# Altium PCB VFD_Clock.PcbDoc (part 2 of 2)
Units mil, origin at the board's own origin, x right, y up, seen from the top; angles counter-clockwise.
Board outline 9810.03 x 3515.03 mil, 2 copper layers (Top Layer, Bottom Layer); 86 components, 150 nets, 539 pads, 317 vias.
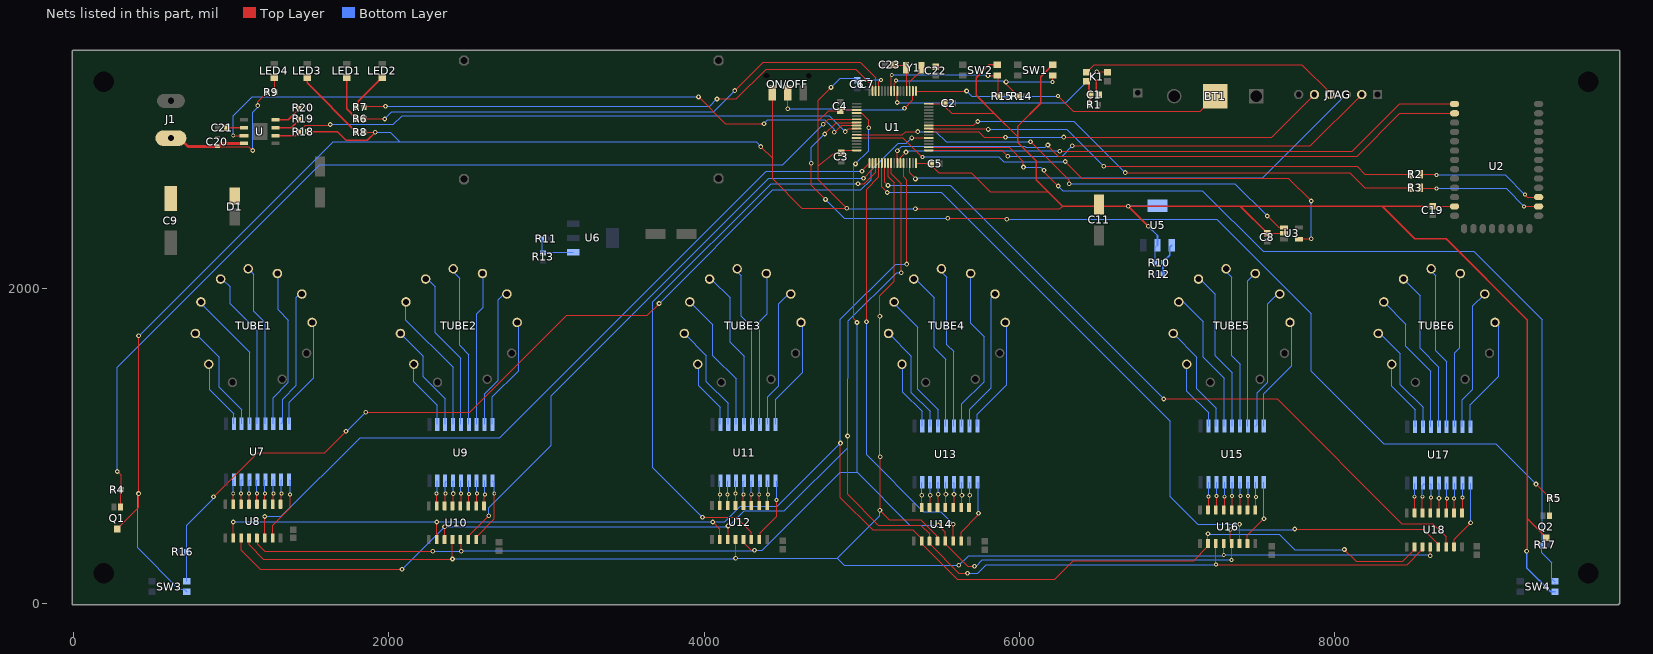
[diagram p2: the nets of this part, all layers, seen from the top]

## Via types
v1: diameter 25, hole 13, Top Layer to Bottom Layer, 162 vias
v2: diameter 30, hole 15, Top Layer to Bottom Layer, 136 vias
v3: diameter 50, hole 28, Top Layer to Bottom Layer, 18 vias
v4: diameter 25, hole 15, Top Layer to Bottom Layer, 1 vias

## Nets (pads, with @x,y where several pads share a name; then routed paths per layer and width w, separated by ;. In a path a pad name is that pad's centre, name@x,y a point inside that pad or via, vN(x,y) a via of type N, cw(c..) or ccw(c..) an arc to the next point about the centre after c; other vN are vias at no path point) (continued)
MCU_VDD: C2.2 C3.2 C4.2 C5.2 C6.1 C7.2 C8.2 C11.1 C19.2 ON/OFF.3 Q1.3 Q2.3 R8.2 R10.2 R18.2 SW1.4 SW2.4 SW3.4 SW4.4 U1.13 U1.19 U1.32 U1.48 U1.64 U2.12 U3.2 U5.2 U5.4 | length 21483.3
  Top Layer w6: Q1.3@280,475.12 280,477.09 415,612.09 v2(415,700) v2(415,1700) ; Q1.3@296.69,468.77 Q1.3@296.69,481.69 ; R8.2@1843.62,2990 v2(1915,2990) ; v2(4360,2900) 4435,2825 ; ON/OFF.3@4435,3237.44 4435,2825 ; v2(4805,3275) 4725,3195 4725,3063.57 ; v2(4905,2508.75) v2@4905,2510 ; U1.32@4967.82,2876.19 4884.62,2876.19 C3.2@4870,2861.57 4827.36,2861.57 4725,2779.21 ; U1.19@4967.82,3132.1 4868.67,3132.1 C4.2@4865,3128.43 4789.85,3128.43 4725,3063.57 ; U1.13@5107.59,3252.18 5108.37,3252.96 5108.37,3311.03 v1(5120.7,3323.36) ; v2(5340,2505) 6256.77,2505 6273.35,2521.57 ; U1.48@5343.81,2795.48 5432.94,2795.48 C5.2@5438.43,2790 ; U1.64@5423.35,3172.64 5511.06,3172.64 C2.2@5513.43,3175 ; C5.2@5456.09,2772.33 C5.2@5438.43,2790 ; C2.2@5523.43,3175 5523.43,3156.57 5570,3110 5840,3110 ; 6179.96,2614.96 6179.92,2615 5815,2615 5695,2735 5486.85,2735 5438.43,2783.43 C5.2@5438.43,2790 ; C8.2@7570,2351.57 7676.18,2351.57 U3.2@7677.76,2350 ; C19.2@8620,2521.57 8621.18,2520.39 U2.12@8758.46,2520.39 ; 4435,2825 4435,2695 4620,2510 v2@4905,2510 ; 4725,2779.21 4725,3063.57 ; 4725,2779.21 4725,2690 v2@4905,2510
  Top Layer w10: R18.2@1484.61,2995 1675,2995 1730,2940 1865,2940 v2(1915,2990) ; ON/OFF.3@4431.57,3240.87 ON/OFF.3@4435,3237.44 ; SW2.4@5860.24,3418.46 5806.3,3418.46 5725,3337.16 5725,3225 5840,3110 5990,2960 ; 6179.92,2615 6105,2689.92 6105,2810 5990,2925 5990,2960 ; 6179.96,2614.96 6273.35,2521.57 v2(6690,2521.57) ; SW1.4@6210.24,3418.46 6135,3343.23 6135,3175 5990,3030 5990,2960 ; v2(6816.57,2395) v2(6690,2521.57) ; C8.2@7570,2351.57 7400,2521.57 ; C19.2@8620,2521.57 8300,2521.57 ; v2(9215,335) 9220,340 9220,542.09 ; Q2.3@9340,420.12 9340,422.09 9220,542.09 ; v2(6690,2521.57) 7400,2521.57 ; 7400,2521.57 8300,2521.57 ; 8300,2521.57 8506.57,2315 8705,2315 9220,1800 9220,542.09
  Bottom Layer w6: 410,685 410,355 671.01,93.99 703.55,93.99 SW3.4@720.24,77.3 ; v2(415,1700) 420,1700 1650,2930 2070,2930 ; v2(1915,2990) 2010,2990 2070,2930 ; v2(4360,2900) 4330,2930 2070,2930 ; v2(4805,3275) 4863.43,3333.43 4958.15,3333.43 C6.1@4970,3321.57 4972.95,3324.53 C7.2@5027.13,3324.53 ; v2(4905,2508.75) 4906.88,2506.88 5338.12,2506.88 v2(5340,2505) ; C7.2@5021.27,3330.54 5021.27,3330.39 C7.2@5027.13,3324.53 ; v1@5119.53,3324.53 C7.2@5035,3324.53 C7.2@5027.13,3324.53 ; R10.2@6860.39,2165 6860.39,2260.39 U5.2@6875,2275
  Bottom Layer w10: v2(6816.57,2395) 6875,2336.57 U5.2@6875,2275 ; v2(9215,335) 9215,230 9367.7,77.3 SW4.4@9395.24,77.3
  Bottom Layer w12: v2(6690,2521.57) 6871.57,2521.57 U5.4@6875,2525
NetC1_1: C1.1 JTAG.4 K1.1 | length 1827.6
  Top Layer w6: K1.1@6425,3372.09 6426.97,3372.09 6474.88,3420 7790,3420 7970,3240 JTAG.4@7970,3230
  Top Layer w10: K1.1@6425,3372.09 6440.67,3356.42 6448.1,3356.42 6485.91,3318.61 6485.91,3245.67 C1.1@6501.57,3230
NetC1_2: C1.2 K1.2 R1.1 | length 160.9
  Top Layer w10: K1.2@6425,3315 6440.67,3299.33 6440.67,3237.76 C1.2@6448.43,3230 6445.47,3227.05 R1.1@6445.47,3165
NetC21_2: C21.2 U.2 | length 109.2
  Top Layer w10: C21.2@973.54,3020 973.74,3019.8 U.2@1082.64,3019.8
NetC22_2: C22.2 U1.3 Y1.1 | length 272.3
  Top Layer w6: U1.3@5304.44,3252.18 5304.44,3309.48 5379.21,3384.25 Y1.1@5379.21,3400 5463.43,3400 C22.2@5470,3406.57
NetC23_2: C23.2 U1.4 Y1.2 | length 235.4
  Top Layer w6: C23.2@5203.15,3420 5206.46,3416.69 5264.1,3416.69 Y1.2@5280.79,3400 5284.75,3396.04 U1.4@5284.75,3252.18
NetJTAG_2: JTAG.2 U1.49 | length 2923.7
  Top Layer w6: U1.49@5424.52,2876.19 5888.81,2876.19 v2(5926.17,2838.83) ; v2(6335,2905) 7845,2905 JTAG.2@8170,3230
  Bottom Layer w6: v2@5925,2840 6270,2840 v2(6335,2905)
NetJTAG_3: JTAG.3 U1.46 | length 3064.7
  Top Layer w6: U1.46@5304.44,2795.48 5304.44,2735.56 5340,2700 v2(5340,2695)
  Bottom Layer w6: v2@5340,2700 5343,2703 7543,2703 JTAG.3@8070,3230
NetJTAG_5: JTAG.5 U1.55 | length 2573.2
  Top Layer w6: U1.55@5424.52,2994.3 5725.7,2994.3 5726.17,2993.83 5741.17,2993.83 5776.17,2958.83 v2(5911.17,2958.83) ; v2(6280,2960) 7600,2960 JTAG.5@7870,3230
  Bottom Layer w6: v2@5910,2960 v2(6280,2960)
NetK1_3: K1.3 U1.7 | length 1485.9
  Top Layer w6: v2(5225.7,3179.3) U1.7@5225.7,3252.18 ; v2(6490,3375) 6553.98,3375 K1.3@6556.89,3372.09
  Bottom Layer w6: v2@5226.43,3178.57 6293.57,3178.57 v2(6490,3375)
NetLED1_2: LED1.2 R6.1 | length 291.1
  Top Layer w8: LED1.2@1736.97,3338.66 LED1.2@1735,3338.66 1735,3138.35 1796.38,3076.97 R6.1@1796.38,3075
NetLED2_2: LED2.2 R7.1 | length 257.6
  Top Layer w8: R7.1@1796.38,3150 1808.13,3161.75 1808.13,3188.76 1956.65,3337.28 1958.62,3337.28 LED2.2@1960,3338.66
NetLED3_2: LED3.2 R8.1 | length 477.6
  Top Layer w8: LED3.2@1485,3338.66 1485,3303.35 1796.38,2991.97 R8.1@1796.38,2990
NetLED4_2: LED4.2 R9.1 | length 100.2
  Top Layer w6: LED4.2@1275,3343.66 1278.62,3340.04 R9.1@1278.62,3245
NetON/OFF_2: ON/OFF.2 U1.2 | length 978
  Top Layer w6: v2(4530,3140) ON/OFF.2@4530,3240.87 ; v2(5271.17,3143.83) 5324.12,3196.78 U1.2@5324.12,3252.18
  Bottom Layer w6: v2(4530,3140) 4892.94,3140 4898.67,3134.27 5255.12,3134.27 5265.84,3145 v2@5270,3145
NetQ1_1: Q1.1 R4.2 U1.22 | length 6245.1
  Top Layer w6: v2(280,840) 304.61,815.39 R4.2@304.61,725 304.61,709.25 301.65,706.3 Q1.1@301.65,614.88 ; v2@4755,3031.58 v2(4755,3040.79) 4786.47,3072.26 4967.04,3072.26 U1.22@4967.82,3073.04
  Bottom Layer w6: v2(280,840) 280,1500 1565,2785 4499.21,2785 v2(4755,3040.79)
NetQ2_1: Q2.1 R5.2 U1.23 | length 6426.5
  Top Layer w6: v2(4680,2795) 4680,2655 v2(4770,2565) ; v2(4765,2980) 4837.58,3052.58 4967.04,3052.58 U1.23@4967.82,3053.36 ; v2(5545,2445) 5915,2445 v2(5920,2440) ; v2(9275,760) 9275.39,760 R5.2@9365.39,670 9361.65,666.26 Q2.1@9361.65,559.88
  Bottom Layer w6: v2(4680,2795) 4680,2895 v2(4765,2980) ; v2(4770,2565) 4890,2445 v2(5545,2445) ; v2(5920,2440) 7250,2440 7850,1840 7850,1475 8310,1015 9020,1015 v2(9275,760)
NetR2_1: R2.1 U2.24 | length 809.3
  Top Layer w6: R2.1@8542.48,2725 8640,2725 v1(8645,2720) ; v1(9205,2595) 9220.55,2579.45 U2.24@9291.54,2579.45
  Bottom Layer w6: v1(8645,2720) 9080,2720 v1(9205,2595)
NetR2_2: R2.2 U1.56 | length 3174.4
  Top Layer w6: U1.56@5424.52,3013.99 5425.3,3013.21 5796.79,3013.21 v2(5801.17,3008.83) ; v2(6535,2775) 8140,2775 8190,2725 R2.2@8477.52,2725
  Bottom Layer w6: v2@5800,3010 6300,3010 v2(6535,2775)
NetR3_1: R3.1 U2.23 | length 798.9
  Top Layer w6: R3.1@8542.48,2640 8547.48,2635 v1(8645,2635) ; v1(9200,2520) 9200.19,2520.2 9291.34,2520.2 U2.23@9291.54,2520.39
  Bottom Layer w6: v1(8645,2635) 9085,2635 v1(9200,2520)
NetR3_2: R3.2 U1.57 | length 3238.6
  Top Layer w6: U1.57@5424.52,3033.67 5711.01,3033.67 v2(5736.17,3058.83) ; v2(6670,2735) 8095,2735 8190,2640 R3.2@8477.52,2640
  Bottom Layer w6: v2@5735,3060 6345,3060 v2(6670,2735)
NetR6_2: R6.2 U1.14 | length 3518.9
  Top Layer w6: R6.2@1843.62,3075 v2(1975,3075) ; v2(4195,3255) 4375,3435 4990,3435 5087.9,3337.1 U1.14@5087.9,3252.18
  Bottom Layer w6: v2(1975,3075) 2020,3120 4060,3120 v2(4195,3255)
NetR7_2: R7.2 U1.15 | length 3401.4
  Top Layer w6: R7.2@1843.62,3150 1843.62,3151.97 1846.65,3155 v2(1980,3155) ; v2(4082.05,3202.05) 4205.62,3202.05 4393.57,3390 4963.04,3390 5067.44,3285.6 5067.44,3252.96 U1.15@5068.22,3252.18
  Bottom Layer w6: v2(1980,3155) 4035,3155 v2(4082.05,3202.05)
NetR10_1: R10.1 R12.2 U5.1 | length 208.6
  Bottom Layer w10: R12.2@6908.62,2090 6909.61,2090.98 R10.1@6909.61,2165 6909.61,2167.95 6952.83,2211.18 6952.83,2262.28 U5.1@6965.55,2275
NetR11_1: R11.1 R13.1 U6.1 | length 284.9
  Bottom Layer w6: R11.1@2975.39,2315.39 2975.39,2229.21 R13.1@2980,2224.61 2985.24,2229.84 U6.1@3170,2229.84
NetR14_2: R14.2 SW1.3 U1.8 | length 1231.6
  Top Layer w6: U1.8@5206.01,3252.18 5206.01,3298.67 5216.17,3308.83 v1(5216.17,3318.83) ; v2(5915,3310) 5915,3296.38 R14.2@5991.38,3220 ; v1(6210,3310) 6210.24,3310.24 SW1.3@6210.24,3351.54
  Bottom Layer w6: v1(5216.17,3318.83) 5892.55,3318.83 5901.38,3310 v2(5915,3310) v1(6210,3310)
NetR15_2: R15.2 SW2.3 U1.9 | length 911.9
  Top Layer w6: U1.9@5186.33,3252.18 5185.66,3252.84 5185.66,3350.66 v1(5190,3355) ; v2(5800,3350) 5858.7,3350 SW2.3@5860.24,3351.54 5866.38,3345.39 R15.2@5866.38,3220
  Bottom Layer w6: v1(5190,3355) 5795,3355 v2(5800,3350)
NetR16_2: R16.2 SW3.3 U1.53 | length 6117.4
  Top Layer w6: v2(890,680) 1170,960 1595,960 v2(1730,1095) ; v2(1855,1215) 2515,1215 3130,1830 3640,1830 v2(3715,1905) ; v2(5317.27,2954.93) U1.53@5424.52,2954.93
  Bottom Layer w6: SW3.3@720.24,144.23 720.24,500.24 890,670 v2(890,680) ; v2(1730,1095) 1735,1095 v2(1855,1215) ; v2(3715,1905) 4435,2625 4995,2625 5060,2690 5060,2750.07 5230.93,2921 5281,2921 v2@5316.1,2956.1
NetR17_2: R17.2 SW4.3 U1.50 | length 6068.1
  Top Layer w6: U1.50@5424.52,2895.88 5934.12,2895.88 6025,2805 v2(6025,2770) ; v2(6155,2750) 6155,2740 v2(6245,2650)
  Bottom Layer w6: v2(6025,2770) 6135,2770 v2(6155,2750) ; v2(6245,2650) 6275,2620 7160,2620 7545,2235 8880,2235 9313,1802 9313,379.02 R17.2@9310.43,376.46 9310.43,324.79 9374.61,260.61 9374.61,160.92 9391.3,144.23 SW4.3@9395.24,144.23 ; SW4.3@9391.3,127.7 SW4.3@9395.24,127.7
NetR18_1: R18.1 U1.25 U.6 | length 3789
  Top Layer w6: R18.1@1435.39,2995 1435.39,2997.95 1472.71,3035.27 1625.27,3035.27 v2(1630,3040) ; v2(4895,2995) 4913.99,3013.99 U1.25@4967.82,3013.99
  Top Layer w10: U.6@1283.43,2969.8 1410.2,2969.8 1423.66,2983.27 1426.61,2983.27 1435.39,2992.05 R18.1@1435.39,2995
  Bottom Layer w6: v2(1630,3040) 2030,3040 2085,3095 4795,3095 v2(4895,2995)
NetR19_2: R19.2 U.7 | length 176.6
  Top Layer w10: U.7@1283.43,3019.8 1383.15,3019.8 1435.39,3072.05 R19.2@1435.39,3075
NetR20_2: R20.2 U.8 | length 184.8
  Top Layer w10: U.8@1283.43,3069.8 1363.15,3069.8 1435.39,3142.05 R20.2@1435.39,3145
NetTUBE1_3: TUBE1.3 U7.O1 | length 710.8
  Bottom Layer w6: U7.O1@1368.54,1143.15 1368.54,1278.54 1525,1435 1525,1775 TUBE1.3@1515,1785
NetTUBE1_4: TUBE1.4 U7.O2 | length 863
  Bottom Layer w6: U7.O2@1318.54,1143.15 1328.54,1153.15 1328.54,1299.35 1415,1385.81 1415,1945 TUBE1.4@1430,1960
NetTUBE1_5: TUBE1.5 U7.O3 | length 993.7
  Bottom Layer w6: U7.O3@1268.54,1143.15 1268.54,1308.54 1365,1405 1365,1800 1300,1865 1300,2070
NetTUBE1_6: TUBE1.6 U7.O4 | length 1018.5
  Bottom Layer w6: TUBE1.6@1110,2105 1130,2105 1145,2090 1145,1855 1218.54,1781.46 U7.O4@1218.54,1143.15
NetTUBE1_7: TUBE1.7 U7.O5 | length 1002.4
  Bottom Layer w6: TUBE1.7@950,2055 995,2010 995,1905 1168.54,1731.46 U7.O5@1168.54,1143.15
NetTUBE1_8: TUBE1.8 U7.O6 | length 894
  Bottom Layer w6: 835,1908.11 820.95,1894.06 1118.54,1596.46 U7.O6@1118.54,1143.15
NetTUBE1_9: TUBE1.9 U7.O7 | length 700.2
  Bottom Layer w6: 795,1730 795,1695 925,1565 925,1375 1068.54,1231.46 U7.O7@1068.54,1143.15
NetTUBE1_10: TUBE1.10 U7.O8 | length 439.9
  Bottom Layer w6: TUBE1.10@866.26,1520 866.26,1358.74 1018.54,1206.46 U7.O8@1018.54,1143.15
NetTUBE2_3: TUBE2.3 U9.O1 | length 715.8
  Bottom Layer w6: U9.O1@2658.54,1138.15 2658.54,1313.54 2825,1480 2825,1763.74 TUBE2.3@2810,1778.74
NetTUBE2_4: TUBE2.4 U9.O2 | length 874.4
  Bottom Layer w6: U9.O2@2608.54,1138.15 2608.54,1333.54 2695,1420 2695,1928.74 2726.26,1960 TUBE2.4@2730,1960
NetTUBE2_5: TUBE2.5 U9.O3 | length 949
  Bottom Layer w6: U9.O3@2558.54,1138.15 2558.54,1838.54 2600,1880 2600,2070
NetTUBE2_6: TUBE2.6 U9.O4 | length 1007.7
  Bottom Layer w6: TUBE2.6@2410,2105 2450,2065 2450,1640 2508.54,1581.46 U9.O4@2508.54,1138.15
NetTUBE2_7: TUBE2.7 U9.O5 | length 1003.2
  Bottom Layer w6: TUBE2.7@2250,2055 2295,2010 2295,1720 2458.54,1556.46 U9.O5@2458.54,1138.15
NetTUBE2_8: TUBE2.8 U9.O6 | length 900.5
  Bottom Layer w6: TUBE2.8@2110,1915 2110,1800 2408.54,1501.46 U9.O6@2408.54,1138.15
NetTUBE2_9: TUBE2.9 U9.O7 | length 694.3
  Bottom Layer w6: TUBE2.9@2075,1715 2220,1570 2220,1440 2358.54,1301.46 U9.O7@2358.54,1138.15
NetTUBE2_10: TUBE2.10 U9.O8 | length 443.4
  Bottom Layer w6: TUBE2.10@2160,1520 2160,1410 2308.54,1261.46 U9.O8@2308.54,1138.15
NetTUBE3_3: TUBE3.3 U11.O1 | length 726.2
  Bottom Layer w6: U11.O1@4453.54,1138.15 4453.54,1298.54 4625,1470 4625,1765 TUBE3.3@4605,1785
NetTUBE3_4: TUBE3.4 U11.O2 | length 874.2
  Bottom Layer w6: U11.O2@4403.54,1138.15 4403.54,1313.54 4475,1385 4475,1905 TUBE3.4@4530,1960
NetTUBE3_5: TUBE3.5 U11.O3 | length 951.1
  Bottom Layer w6: U11.O3@4353.54,1138.15 4353.54,1793.54 4400,1840 4400,2070
NetTUBE3_6: TUBE3.6 U11.O4 | length 1025.6
  Bottom Layer w6: TUBE3.6@4210,2125 4210,2105 4235,2080 4235,1825 4303.54,1756.46 U11.O4@4303.54,1138.15
NetTUBE3_7: TUBE3.7 U11.O5 | length 1001.2
  Bottom Layer w6: TUBE3.7@4050,2055 4165,1940 4165,1660 4253.54,1571.46 U11.O5@4253.54,1138.15
NetTUBE3_8: TUBE3.8 U11.O6 | length 898.4
  Bottom Layer w6: TUBE3.8@3910,1915 4055,1770 4055,1575 4203.54,1426.46 U11.O6@4203.54,1138.15
NetTUBE3_9: TUBE3.9 U11.O7 | length 692.2
  Bottom Layer w6: TUBE3.9@3875,1715 4015,1575 4015,1410 4153.54,1271.46 U11.O7@4153.54,1138.15
NetTUBE3_10: TUBE3.10 U11.O8 | length 439.2
  Bottom Layer w6: TUBE3.10@3965,1520 3965,1385 4103.54,1246.46 U11.O8@4103.54,1138.15
NetTUBE4_3: TUBE4.3 U13.O1 | length 742.4
  Bottom Layer w6: U13.O1@5733.54,1128.15 5733.54,1203.54 5920,1390 5920,1765 TUBE4.3@5900,1785
NetTUBE4_4: TUBE4.4 U13.O2 | length 903.7
  Bottom Layer w6: U13.O2@5683.54,1128.15 5683.54,1233.54 5821.26,1371.26 5821.26,1941.26 TUBE4.4@5845,1965
NetTUBE4_5: TUBE4.5 U13.O3 | length 1060.7
  Bottom Layer w6: U13.O3@5633.54,1128.15 5633.54,1268.54 5775,1410 5775,1695 5690,1780 TUBE4.5@5690,2095
NetTUBE4_6: TUBE4.6 U13.O4 | length 1009.4
  Bottom Layer w6: TUBE4.6@5505,2105 5540,2070 5540,1645 5583.54,1601.46 U13.O4@5583.54,1128.15
NetTUBE4_7: TUBE4.7 U13.O5 | length 1004.9
  Bottom Layer w6: TUBE4.7@5345,2055 5460,1940 5460,1625 5533.54,1551.46 U13.O5@5533.54,1128.15
NetTUBE4_8: TUBE4.8 U13.O6 | length 902.2
  Bottom Layer w6: TUBE4.8@5205,1915 5205,1905 5355,1755 5355,1360 5483.54,1231.46 U13.O6@5483.54,1128.15
NetTUBE4_9: TUBE4.9 U13.O7 | length 696
  Bottom Layer w6: TUBE4.9@5170,1715 5315,1570 5315,1340 5433.54,1221.46 U13.O7@5433.54,1128.15
NetTUBE4_10: TUBE4.10 U13.O8 | length 442.5
  Bottom Layer w6: TUBE4.10@5261.26,1520 5261.26,1343.74 5383.54,1221.46 U13.O8@5383.54,1128.15
NetTUBE5_3: TUBE5.3 U15.O1 | length 729.9
  Bottom Layer w6: U15.O1@7548.54,1128.15 7548.54,1333.54 7725,1510 7725,1763.74 TUBE5.3@7710,1778.74
NetTUBE5_4: TUBE5.4 U15.O2 | length 886.3
  Bottom Layer w6: U15.O2@7498.54,1128.15 7508.54,1138.15 7508.54,1338.54 7575,1405 7575,1905 TUBE5.4@7630,1960
NetTUBE5_5: TUBE5.5 U15.O3 | length 1002.6
  Bottom Layer w6: U15.O3@7448.54,1128.15 7448.54,2048.54 7476.77,2076.77 7476.77,2088.23 7495,2070 7500,2070
NetTUBE5_6: TUBE5.6 U15.O4 | length 1013.5
  Bottom Layer w6: TUBE5.6@7310,2105 7345,2070 7345,1575 7398.54,1521.46 U15.O4@7398.54,1128.15
NetTUBE5_7: TUBE5.7 U15.O5 | length 1009.1
  Bottom Layer w6: TUBE5.7@7150,2055 7240,1965 7240,1575 7348.54,1466.46 U15.O5@7348.54,1128.15
NetTUBE5_8: TUBE5.8 U15.O6 | length 906
  Bottom Layer w6: 7035,1925 7035,1920 7165,1790 7165,1565 7298.54,1431.46 U15.O6@7298.54,1128.15
NetTUBE5_9: TUBE5.9 U15.O7 | length 700.2
  Bottom Layer w6: TUBE5.9@6975,1715 7125,1565 7125,1365 7248.54,1241.46 U15.O7@7248.54,1128.15
NetTUBE5_10: TUBE5.10 U15.O8 | length 451.8
  Bottom Layer w6: TUBE5.10@7066.26,1520 7060,1513.74 7060,1350 7198.54,1211.46 U15.O8@7198.54,1128.15
NetTUBE6_3: TUBE6.3 U17.O1 | length 747.4
  Bottom Layer w6: U17.O1@8858.54,1123.15 8858.54,1263.54 9040,1445 9040,1760 TUBE6.3@9015,1785
NetTUBE6_4: TUBE6.4 U17.O2 | length 900.4
  Bottom Layer w6: U17.O2@8808.54,1123.15 8808.54,1293.54 8875,1360 8875,1890 TUBE6.4@8950,1965
NetTUBE6_5: TUBE6.5 U17.O3 | length 987
  Bottom Layer w6: U17.O3@8758.54,1123.15 8758.54,1593.54 8790,1625 8790,2090 TUBE6.5@8795,2095
NetTUBE6_6: TUBE6.6 U17.O4 | length 1042.7
  Bottom Layer w6: TUBE6.6@8610,2125 8610,2110 8640,2080 8640,1605 8708.54,1536.46 U17.O4@8708.54,1123.15
NetTUBE6_7: TUBE6.7 U17.O5 | length 1029.4
  Bottom Layer w6: TUBE6.7@8435,2060 8540,1955 8540,1620 8658.54,1501.46 U17.O5@8658.54,1123.15
NetTUBE6_8: TUBE6.8 U17.O6 | length 915.5
  Bottom Layer w6: TUBE6.8@8310,1915 8450,1775 8450,1635 8608.54,1476.46 U17.O6@8608.54,1123.15
NetTUBE6_9: TUBE6.9 U17.O7 | length 715.2
  Bottom Layer w6: TUBE6.9@8275,1715 8285,1715 8415,1585 8415,1390 8558.54,1246.46 U17.O7@8558.54,1123.15
NetTUBE6_10: TUBE6.10 U17.O8 | length 461
  Bottom Layer w6: TUBE6.10@8366.26,1520 8360,1513.74 8360,1380 8508.54,1231.46 U17.O8@8508.54,1123.15
NetU1_20: U1.20 U8.13 U10.13 U12.13 U14.13 U16.13 U18.13 | length 10882.6
  Top Layer w6: U8.13@1165,417.72 1171.8,410.91 1171.8,378.2 1215,335 v2(2280,335) ; U10.13@2455,407.72 2460,402.72 v2(2460,335) ; U12.13@4250,410 4250,390 4300,340 v2(4320,340) ; v2(4960,2790) 4948.17,2778.17 4948.17,1806.83 v2(4970,1785) ; U1.20@4967.82,3112.41 4968.6,3111.63 5001.24,3111.63 5045,3067.88 v2(5045,3020) ; v2(5485,500) 5530,455 U14.13@5530,397.72 5530,380.98 5670.98,240 v2(5715,240) ; v2(7335,470) 7335,392.72 U16.13@7345,382.72 v1(7345,280) ; v2(7745,475) 8559.45,475 8655,379.45 U18.13@8655,362.72
  Bottom Layer w6: v2(2280,335) v2(2460,335) 2462.5,337.5 4317.5,337.5 v2(4320,340) 4370,340 4865,835 4970,835 ; v2(4960,2790) 5045,2875 v2(5045,3020) ; v2(4970,1785) 4970,835 ; v2(5485,500) 5305,500 4970,835 ; v2(5715,240) 5725,240 5765,280 v1(7345,280) ; v2(7335,470) 7740,470 v2(7745,475)
NetU1_24: U1.24 U.3 | length 4338
  Top Layer w6: v1(1015.2,2969.8) U.3@1082.64,2969.8 ; v2(3965,3215) 4135,3045 v2(4380,3045) ; v2(4825,2990) 4830,2990 4873.67,3033.67 U1.24@4967.82,3033.67
  Bottom Layer w6: v1(1015.2,2969.8) 1015.2,3095.2 1135,3215 v2(3965,3215) ; v2(4380,3045) 4403.79,3068.79 4766.6,3068.79 4825,3010.39 v2(4825,2990)
NetU1_27: U1.27 U3.1 | length 2982.4
  Top Layer w6: U1.27@4967.82,2974.62 4968.6,2973.84 5256.16,2973.84 5277.32,2995 v2(5355,2995) ; v2(6070,2930) 6315,2685 v2(6315,2665) ; v2(7570,2460) 7642.6,2387.4 U3.1@7677.76,2387.4
  Bottom Layer w6: v2(5355,2995) 5470,2995 5535,2930 v2(6070,2930) ; v2(6315,2665) 7365,2665 v2(7570,2460)
NetU1_28: U1.28 U3.4 | length 3366.6
  Top Layer w6: U1.28@4967.82,2954.93 5260.07,2954.93 5380,2835 v1(5385,2835) ; v2(6290,2805) 6395,2700 7705,2700 v2(7850,2555) ; U3.4@7772.24,2312.6 7774.65,2315 v2(7850,2315)
  Bottom Layer w6: v1(5385,2835) 5870,2835 5900,2805 v2(6290,2805) ; v2(7850,2315) v2(7850,2555)
NetU1_33: U1.33 U8.14 | length 4900.7
  Top Layer w6: U8.14@1215,417.72 v2(1215,555) ; v2(5001.17,2743.83) 5001.17,2748.12 U1.33@5048.53,2795.48
  Bottom Layer w6: v2(1215,555) 1320,555 1820,1055 2705,1055 4395,2745 v2@5000,2745
NetU1_34: U1.34 U10.14 | length 3794.1
  Top Layer w6: U10.14@2505,415.28 2505,430 v2(2635,560) ; v2(5011.17,2698.83) 5067.44,2755.1 5067.44,2794.7 U1.34@5068.22,2795.48
  Bottom Layer w6: v2(2635,560) 2635,611.26 3030,1006.26 3030,1320 4410,2700 v2@5010,2700
NetU1_35: U1.35 U12.14 | length 3700.7
  Top Layer w6: v2(3990,550) 4203.42,550 4300,453.42 U12.14@4300,410 ; v2(4976.17,2663.83) 5015.77,2663.83 5087.9,2735.97 U1.35@5087.9,2795.48
  Bottom Layer w6: v2(3990,550) 3675,865 3675,1915 4425,2665 v2@4975,2665
NetU1_36: U1.36 U14.14 | length 2722.2
  Top Layer w6: v2(5030,1790) 5030,2630 5107.59,2707.59 U1.36@5107.59,2795.48 ; U14.14@5580,397.72 v2(5580,505)
  Bottom Layer w6: v2(5030,1790) 5030,945 5390,585 5500,585 v2(5580,505)
NetU1_37: U1.37 U16.14 | length 3711.1
  Top Layer w6: U1.37@5127.27,2795.48 5127.27,2644.63 5161.17,2610.74 v2(5161.17,2608.83) ; U16.14@7395,382.72 v2(7395,505)
  Bottom Layer w6: v2@5160,2610 5505,2610 6955,1160 6955,680 7130,505 v2(7395,505)
NetU1_38: U1.38 U18.14 | length 4675.6
  Top Layer w6: U1.38@5146.96,2795.48 5146.96,2673.04 v2(5166.17,2653.83) ; v2(6915,1300) 7635,1300 8425,510 8620,510 8705,425 U18.14@8705,362.72
  Bottom Layer w6: v2@5165,2655 5560,2655 v2(6915,1300)
NetU1_39: U1.39 U8.12 U10.12 U12.12 U14.12 U16.12 U18.12 | length 11133.4
  Top Layer w6: U8.12@1115,417.72 1115,374.3 1204.3,285 v2(2405,285) U10.12@2405,407.72 ; v2(4200,290) U12.12@4200,410 ; v2(5115,1825) 5115,1955 5205,2045 5205,2670 5166.64,2708.36 U1.39@5166.64,2795.48 ; v2(5116.88,933.12) 5115.94,932.19 5115.94,595.94 v2(5115,595) 5175,535 5375,535 5480,430 U14.12@5480,397.72 ; v1(7295,310) U16.12@7295,382.72 ; v2(8605,305) U18.12@8605,362.72
  Bottom Layer w6: v2(2405,285) 2407.5,287.5 4197.5,287.5 v2(4200,290) 4845,290 ; v2(5115,595) 5115,560 4845,290 ; v2(5115,1825) 5115,935 v2(5116.88,933.12) ; v2(8605,305) 8598.51,305 8590.51,313 7298,313 v1(7295,310) 7292,307 5677,307 v2(5615,245) 4890,245 4845,290
NetU1_40: U1.40 U8.11 U10.11 U12.11 U14.11 U16.11 U18.11 | length 10921.8
  Top Layer w6: U8.11@1065,417.72 1065,340 1185,220 v2(2085,220) ; U10.11@2355,407.72 v2(2355,490) ; U12.11@4150,410 4152.5,412.5 v2(4152.5,495) ; v2(4910,1065) 4910,695 5105,500 5375,500 5430,445 U14.11@5430,397.72 5430,380.98 5615.98,195 v2(5670,195) ; U1.40@5186.33,2795.48 5186.33,2728.67 5250,2665 v2(5250,2100) ; U16.11@7245,382.72 7250,377.72 7245,372.72 v1(7245,250) 8459.02,250 8555,345.98 U18.11@8555,362.72
  Bottom Layer w6: v2(2085,220) v2(2355,490) 4147.5,490 v2(4152.5,495) 4160,495 4255,590 4510,590 4910,990 v2(4910,1065) 4915,1795 ; 4915,1796.49 5223.32,2100.2 v2(5250,2100) ; v2(5670,195) 5735,195 5790,250 v1(7245,250)
NetU1_42: U1.42 U2.2 | length 3778.7
  Top Layer w6: U1.42@5224.92,2796.26 U1.42@5225.7,2795.48 5225.93,2795.72 v2(5225.93,2874.07) ; v2(6180,2910.2) 6180,2905.4 6245.4,2840 8140,2840 8410.94,3110.94 U2.2@8758.46,3110.94
  Bottom Layer w6: v2@5224.76,2875.24 5252.53,2903 6032.4,2903 6040.4,2895 6164.8,2895 v2(6180,2910.2)
NetU1_43: U1.43 U2.1 | length 3702.2
  Top Layer w6: U1.43@5246.16,2796.26 U1.43@5245.38,2795.48 5245.38,2830.38 v2(5280,2865) ; v2(6255,2870) 8110,2870 8410,3170 U2.1@8758.46,3170
  Bottom Layer w6: v2@5270,2865 5278,2873 6252,2873 v2(6255,2870)
NetU1_44: U1.44 U8.10 U10.10 U12.10 U14.10 U16.10 U18.10 | length 10904.5
  Top Layer w6: U8.10@1015,417.72 v2(1015,520) ; U10.10@2305,407.72 v2(2305,520) ; v2(4055,520) 4100,475 U12.10@4100,410 ; v2(4865,1020) 4865,675 5070,470 5324.45,470 5380,414.45 U14.10@5380,397.72 5380,380.98 5603.98,157 6222,157 6340,275 7104.02,275 7195,365.98 U16.10@7195,382.72 v2(7195,445) ; U1.44@5265.07,2795.48 5265.07,2707.27 5285,2687.34 v2(5285,2155) ; v2(8060,345) 8135,270 8429.02,270 8505,345.98 U18.10@8505,362.72
  Bottom Layer w6: v2(1015,520) v2(2305,520) v2(4055,520) 4130,520 4230,620 4465,620 v2(4865,1020) 4865,1805 5215,2155 v2(5285,2155) ; v2(7195,445) 7198,442 7648,442 7745,345 v2(8060,345)
NetU7_I1: U7.I1 U8.15 | length 417.4
  Top Layer w6: U8.15@1265,417.72 1265,500 1375,610 v1(1375,695)
  Bottom Layer w6: U7.I1@1368.54,786.85 1375,780.39 v1(1375,695)
NetU7_I2: U7.I2 U8.1 | length 157.3
  Top Layer w6: U8.1@1315,632.28 1320,637.28 v1(1320,700)
  Bottom Layer w6: U7.I2@1318.35,786.85 1320,785.2 v1(1320,700)
NetU7_I3: U7.I3 U8.2 | length 157.2
  Top Layer w6: U8.2@1265,632.28 1270,637.28 v1(1270,700)
  Bottom Layer w6: U7.I3@1268.54,786.85 1268.54,701.46 v1(1270,700)
NetU7_I4: U7.I4 U8.3 | length 156
  Top Layer w6: U8.3@1215,632.28 v1(1215,700)
  Bottom Layer w6: v1(1215,700) 1215,783.31 U7.I4@1218.54,786.85
NetU7_I5: U7.I5 U8.4 | length 156
  Top Layer w6: U8.4@1165,632.28 v1(1165,700)
  Bottom Layer w6: v1(1165,700) 1165,783.31 U7.I5@1168.54,786.85
NetU7_I6: U7.I6 U8.5 | length 161.4
  Top Layer w6: U8.5@1115,632.28 1120,637.28 1115,642.28 v1(1115,700)
  Bottom Layer w6: v1(1115,700) 1115,780.39 1120,785.39 U7.I6@1118.54,786.85
NetU7_I7: U7.I7 U8.6 | length 158.1
  Top Layer w6: U8.6@1065,632.28 v1(1065,700)
  Bottom Layer w6: v1(1065,700) 1065,783.31 U7.I7@1068.54,786.85 U7.I7@1070,785.39
NetU7_I8: U7.I8 U8.7 | length 156
  Top Layer w6: U8.7@1015,632.28 v1(1015,700)
  Bottom Layer w6: v1(1015,700) 1015,783.31 U7.I8@1018.54,786.85
NetU9_I1: U9.I1 U10.15 | length 426.5
  Top Layer w6: U10.15@2555,407.72 2555,424.45 2670,539.45 v1(2670,700)
  Bottom Layer w6: U9.I1@2658.54,781.85 2668.54,771.85 2668.54,701.46 v1(2670,700)
NetU9_I2: U9.I2 U10.1 | length 162.3
  Top Layer w6: U10.1@2605,622.28 2605,690 v1(2610,695)
  Bottom Layer w6: U9.I2@2608.35,781.85 2610,780.2 v1(2610,695)
NetU9_I3: U9.I3 U10.2 | length 162.2
  Top Layer w6: U10.2@2555,622.28 2560,627.28 v1(2560,700)
  Bottom Layer w6: U9.I3@2558.54,781.85 2558.54,701.46 v1(2560,700)
NetU9_I4: U9.I4 U10.3 | length 162.2
  Top Layer w6: U10.3@2505,622.28 2510,627.28 2508.54,628.74 v1(2508.54,696.46)
  Bottom Layer w6: v1(2508.54,696.46) U9.I4@2508.54,781.85
NetU9_I5: U9.I5 U10.4 | length 162.2
  Top Layer w6: U10.4@2455,622.28 2460,627.28 v1(2460,700)
  Bottom Layer w6: U9.I5@2458.54,781.85 2458.54,701.46 v1(2460,700)
NetU9_I6: U9.I6 U10.5 | length 165.2
  Top Layer w6: U10.5@2405,622.28 2410,627.28 v2(2410,700)
  Bottom Layer w6: U9.I6@2408.54,781.85 2405,778.31 2410,773.31 v2(2410,700)
NetU9_I7: U9.I7 U10.6 | length 170.5
  Top Layer w6: U10.6@2355,622.28 2360,627.28 v1(2360,700)
  Bottom Layer w6: U9.I7@2358.54,781.85 2365,775.39 2355,765.39 2360,760.39 v1(2360,700)
NetU9_I8: U9.I8 U10.7 | length 161
  Top Layer w6: U10.7@2305,622.28 v1(2305,700)
  Bottom Layer w6: v1(2305,700) 2308.54,703.54 U9.I8@2308.54,781.85
NetU11_I1: U11.I1 U12.15 | length 420.1
  Top Layer w6: U12.15@4350,410 4356.8,416.8 4356.8,451.8 4460,555 v1(4460,660)
  Bottom Layer w6: U11.I1@4453.54,781.85 4460,775.39 v1(4460,660)
NetU11_I2: U11.I2 U12.1 | length 160
  Top Layer w6: U12.1@4400,624.57 4405,629.57 v1(4405,695)
  Bottom Layer w6: U11.I2@4403.35,781.85 4405,780.2 v1(4405,695)
NetU11_I3: U11.I3 U12.2 | length 158.7
  Top Layer w6: U12.2@4350,624.57 v1(4350,695)
  Bottom Layer w6: v1(4350,695) 4350,778.31 U11.I3@4353.54,781.85
NetU11_I4: U11.I4 U12.3 | length 158.7
  Top Layer w6: U12.3@4300,624.57 v4(4300,695)
  Bottom Layer w6: v4(4300,695) 4300,778.31 U11.I4@4303.54,781.85
NetU11_I5: U11.I5 U12.4 | length 158.7
  Top Layer w6: U12.4@4250,624.57 v1(4250,695)
  Bottom Layer w6: v1(4250,695) 4250,778.31 U11.I5@4253.54,781.85
NetU11_I6: U11.I6 U12.5 | length 158.7
  Top Layer w6: U12.5@4200,624.57 v1(4200,700)
  Bottom Layer w6: v1(4200,700) 4200,778.31 U11.I6@4203.54,781.85
NetU11_I7: U11.I7 U12.6 | length 158.7
  Top Layer w6: U12.6@4150,624.57 v1(4150,695)
  Bottom Layer w6: v1(4150,695) 4150,778.31 U11.I7@4153.54,781.85
NetU11_I8: U11.I8 U12.7 | length 158.7
  Top Layer w6: U12.7@4100,624.57 v1(4100,695)
  Bottom Layer w6: v1(4100,695) 4100,778.31 U11.I8@4103.54,781.85
NetU13_I1: U13.I1 U14.15 | length 422.4
  Top Layer w6: U14.15@5630,397.72 5630,455 5740,565 v2(5740,575)
  Bottom Layer w6: U13.I1@5733.54,771.85 5740,765.39 v2(5740,575)
NetU13_I2: U13.I2 U14.1 | length 165.1
  Top Layer w6: U14.1@5680,612.28 5685,617.28 v2(5685,690)
  Bottom Layer w6: U13.I2@5683.35,771.85 5680,768.5 5685,763.5 v2(5685,690)
NetU13_I3: U13.I3 U14.2 | length 165.2
  Top Layer w6: U14.2@5630,612.28 5635,617.28 v2(5635,690)
  Bottom Layer w6: U13.I3@5633.54,771.85 5630,768.31 5635,763.31 v2(5635,690)
NetU13_I4: U13.I4 U14.3 | length 165.2
  Top Layer w6: U14.3@5580,612.28 5585,617.28 v2(5585,695)
  Bottom Layer w6: U13.I4@5583.54,771.85 5580,768.31 5585,763.31 v2(5585,695)
NetU13_I5: U13.I5 U14.4 | length 161
  Top Layer w6: U14.4@5530,612.28 5533.54,615.82 v2(5533.54,696.46)
  Bottom Layer w6: v2(5533.54,696.46) U13.I5@5533.54,771.85
NetU13_I6: U13.I6 U14.5 | length 165.2
  Top Layer w6: U14.5@5480,612.28 5485,617.28 v2(5485,695)
  Bottom Layer w6: U13.I6@5483.54,771.85 5480,768.31 5485,763.31 v2(5485,695)
NetU13_I7: U13.I7 U14.6 | length 165.2
  Top Layer w6: U14.6@5430,612.28 5435,617.28 v2(5435,690)
  Bottom Layer w6: U13.I7@5433.54,771.85 5430,768.31 5435,763.31 v2(5435,690)
NetU13_I8: U13.I8 U14.7 | length 161
  Top Layer w6: U14.7@5380,612.28 v2(5380,690)
  Bottom Layer w6: v2(5380,690) 5380,768.31 U13.I8@5383.54,771.85
NetU15_I1: U15.I1 U16.15 | length 433.2
  Top Layer w6: U16.15@7445,382.72 7445,435 v2(7550,540)
  Bottom Layer w6: U15.I1@7548.54,771.85 7550,770.39 v2(7550,540)
NetU15_I2: U15.I2 U16.1 | length 173.2
  Top Layer w6: U16.1@7495,600 7498.14,603.14 v1(7498.14,678.14)
  Bottom Layer w6: v1(7498.14,678.14) 7498.35,678.35 U15.I2@7498.35,771.85
NetU15_I3: U15.I3 U16.2 | length 177.6
  Top Layer w6: U16.2@7445,597.28 7450,602.28 v1(7450,685)
  Bottom Layer w6: U15.I3@7448.54,771.85 7448.14,771.45 7450,769.59 v1(7450,685)
NetU15_I4: U15.I4 U16.3 | length 198.7
  Top Layer w6: U16.3@7385,590 7400,605 v1(7400,685)
  Bottom Layer w6: U15.I4@7398.54,771.85 7400,770.39 v1(7400,685) v1@7400,675
NetU15_I5: U15.I5 U16.4 | length 187.5
  Top Layer w6: U16.4@7335,590 7348.54,603.54 v1(7348.54,683.54)
  Bottom Layer w6: v1(7348.54,683.54) U15.I5@7348.54,771.85
NetU15_I6: U15.I6 U16.5 | length 177.2
  Top Layer w6: U16.5@7295,597.28 7300,602.28 v1(7300,680)
  Bottom Layer w6: U15.I6@7298.54,771.85 7300,770.39 v1(7300,680)
NetU15_I7: U15.I7 U16.6 | length 188.7
  Top Layer w6: U16.6@7235,590 7250,605 v1(7250,685)
  Bottom Layer w6: U15.I7@7248.54,771.85 7250,770.39 v1(7250,685)
NetU15_I8: U15.I8 U16.7 | length 177.2
  Top Layer w6: U16.7@7195,597.28 7200,602.28 7198.54,603.74 v1(7198.54,681.46)
  Bottom Layer w6: v1(7198.54,681.46) U15.I8@7198.54,771.85
NetU17_I1: U17.I1 U18.15 | length 448.2
  Top Layer w6: U18.15@8755,362.72 8755,410 v2(8860,515)
  Bottom Layer w6: U17.I1@8858.54,766.85 8860,765.39 v2(8860,515)
NetU17_I2: U17.I2 U18.1 | length 196.5
  Top Layer w6: U18.1@8805,577.28 8810,582.28 v1(8810,675)
  Bottom Layer w6: U17.I2@8808.35,766.85 8815,760.2 8810,755.2 v1(8810,675)
NetU17_I3: U17.I3 U18.2 | length 191
  Top Layer w6: U18.2@8755,577.28 v1(8755,670)
  Bottom Layer w6: v1(8755,670) 8758.54,673.54 U17.I3@8758.54,766.85
NetU17_I4: U17.I4 U18.3 | length 192.2
  Top Layer w6: U18.3@8705,577.28 8710,582.28 v1(8710,670)
  Bottom Layer w6: U17.I4@8708.54,766.85 8708.54,671.46 v1(8710,670)
NetU17_I5: U17.I5 U18.4 | length 195.2
  Top Layer w6: U18.4@8655,577.28 8660,582.28 v2(8660,670)
  Bottom Layer w6: U17.I5@8658.54,766.85 8655,763.31 8660,758.31 v2(8660,670)
NetU17_I6: U17.I6 U18.5 | length 195.2
  Top Layer w6: U18.5@8605,577.28 8610,582.28 v1(8610,675)
  Bottom Layer w6: U17.I6@8608.54,766.85 8605,763.31 8610,758.31 v1(8610,675)
NetU17_I7: U17.I7 U18.6 | length 196.4
  Top Layer w6: U18.6@8555,577.28 v1(8555,680)
  Bottom Layer w6: v1(8555,680) 8555,750.39 8565,760.39 U17.I7@8558.54,766.85
NetU17_I8: U17.I8 U18.7 | length 196.4
  Top Layer w6: U18.7@8505,577.28 8510,582.28 8505,587.28 v1(8505,680)
  Bottom Layer w6: v1(8505,680) 8505,760.39 8510,765.39 U17.I8@8508.54,766.85
PWR_5V: C9.1 C20.2 D1.1 J1.1 R9.2 U.4 | length 1143.9
  Top Layer w6: C20.2@915,2900.47 920.59,2900.47 1113.25,2900.47 v2(1138.72,2875) ; v2(1170,3160) 1170,3183.62 R9.2@1231.38,3245
  Top Layer w20: J1.1@620,2943.78 J1.1@630,2953.78 ; J1.1@620,2953.78 J1.1@630,2953.78 ; C20.2@915,2900.47 727.93,2900.47 674.62,2953.78 J1.1@630,2953.78 ; C20.2@920.59,2900.47 939.92,2919.8 U.4@1082.64,2919.8
  Bottom Layer w6: v2(1138.72,2875) 1138.72,3118.72 1170,3150 v2(1170,3160)
VBAT: BT1.3 U1.1 | length 1993.4
  Top Layer w6: U1.1@5343.81,3252.18 5343.81,3249.68 5346.3,3252.18 v2(5664.52,3252.18) ; v1(6245,3220) 6340,3125 7145,3125 BT1.3@7240,3220
  Bottom Layer w6: v2@5663.35,3253.35 5696.69,3220 v1(6245,3220)
pads on no net: JTAG.1 K1.4 ON/OFF.MH1 ON/OFF.MH2 Q1.2 Q2.2 SW1.1 SW1.2 SW2.1 SW2.2 SW3.1 SW3.2 SW4.1 SW4.2 U1.5 U1.6 U1.10 U1.11 U1.16 U1.17 U1.21 U1.26 U1.29 U1.30 U1.41 U1.45 U1.51 U1.52 U1.54 U1.58 U1.59 U1.61 U1.62 U2.3 U2.4 U2.5 U2.6 U2.7 U2.8 U2.9 U2.10 U2.11 U2.15 U2.16 U2.17 U2.18 U2.19 U2.20 U2.25 U2.26 U2.27 U2.28 U2.29 U2.30 U2.31 U2.32 U2.33 U2.34 U3.3 U8.9 U10.9 U12.9 U14.9 U16.9 U18.9

## Polygon pours and split planes (outlines as drawn)
GND on Bottom Layer "Bottom Layer-GND" (solid, pour order 12): 75,3030 537.4,3445 9170,3445 9535,3070 9535,3050 9535,395 9360,220 6965,220 6815,75 6810,75 600,75 600,80 75,605
PWR_5V on Top Layer (solid, pour order 18): 560,2585 1105,2585 1105,2625 695,3035 490,3035 490,2655

## Silkscreen, mask and mechanical layers (free items; w line width, h text height)
Top Overlay:
  circle w10: c195,3310 r92.21
  circle w10: c195,195 r92.21
  circle w10: c9605,195.01 r92.21
  circle w10: c9605,3309.99 r92.21
  text "+5V" at 2545,3410 h60
  text "+25V" at 3810,3405 h60
  text "GND" at 2710,2790 h60
  text "GND" at 3855,2675 h60
  text "GND" at 2545,2670 h60
  text "12-25-2019" at 8500,75 h130
  text "jdanielski" at 7325,55 h130
Mechanical 1:
  lines w25: 0,3505 0,0 9800,0 9800,3505 5,3505